# Altium PCB Receptor32UV1.0.PcbDoc
Units mm, origin at the board's own origin, x right, y up, seen from the top; angles counter-clockwise.
Board outline 400 x 50 mm, 2 copper layers (Top Layer, Bottom Layer); 88 components, 84 nets, 509 pads, 115 vias.
Unrouted connection lines stored in the file: 2.
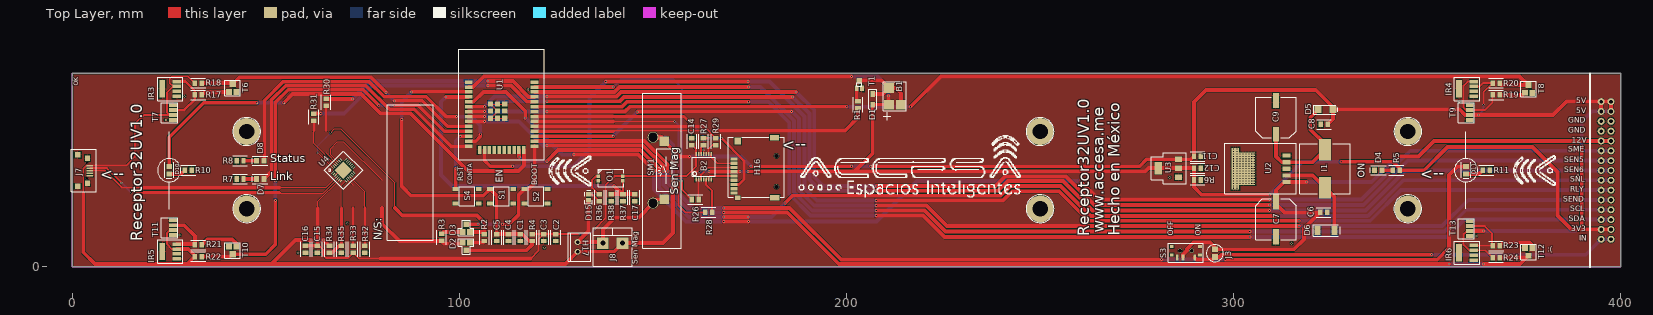
[diagram p0: Top Layer view]
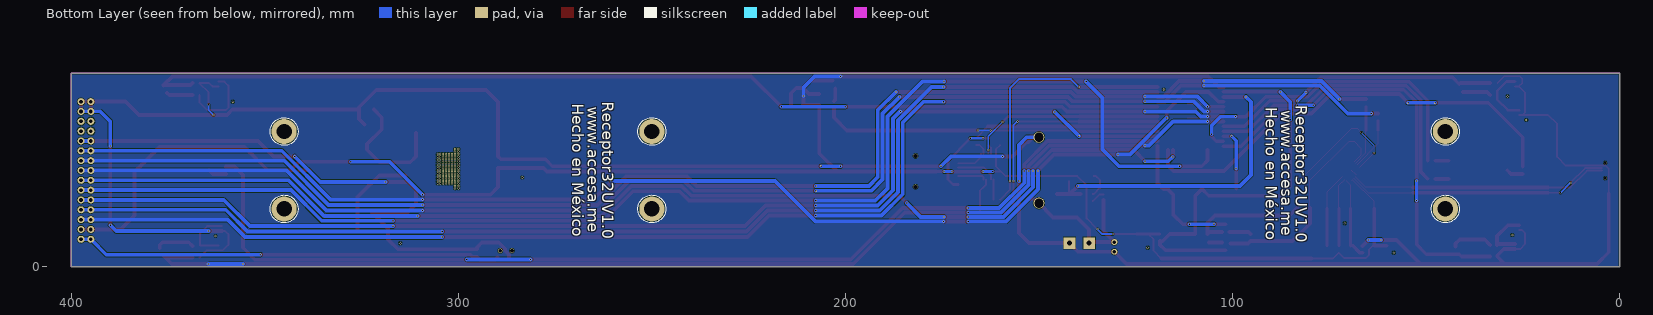
[diagram p1: Bottom Layer view, seen from below]

## Layer stack, top to bottom
Top Solder: solder mask 0.0102, Solder Resist, Dk 3.5
Top Layer: signal copper 0.0356
Dielectric 1: dielectric 0.32, FR-4, Dk 4.8
Bottom Layer: signal copper 0.0356
Bottom Solder: solder mask 0.0102, Solder Resist, Dk 3.5

## Board outline
0,0 400,0 400,50 0,50

## Design rules (kind name [scope] priority, off if disabled: settings)
Clearance [All] p1: gap=0.15
PolygonConnect [All] p1: connectstyle=Relief reliefconductorwidth=0.254 reliefentries=4 polygonreliefangle="90 Angle" airgapwidth=0.254
RoutingVias [All] p1: holewidth=0.3 width=0.5 viastyle="Through Hole" minholewidth=0.3 minwidth=0.4 maxholewidth=0.3 maxwidth=0.5
SolderMaskExpansion [All] p1: expansion=0.102
Width [All] p1: maxlimit=5 minlimit=0.1 preferedwidth=0.5
30 further rules are at their usual default settings.

## Classes and differential pairs
component class "Reset Contador": S4
component class Optoacoplador: C17 D15 H17 J8 O1 R36 R37 R38
component class Buzzer: B1 D1 R1 T1
component class ESP32: C1 C2 C3 C4 C5 D2 D3 R2 R3 R4 S1 S2 U1
component class Fuente: C6 C7 C8 C9 C11 C12 D4 D5 D6 I1 J3 R5 R6 S3 U3
component class "Leds Indicadores": D7 D8 D10 D11 R7 R8 R10 R11
component class "Receptor U": IR3 IR4 IR5 IR6 R17 R18 R19 R20 R21 R22 R23 R24 T6 T7 T8 T9 T10 T11 T12 T13
component class SD: B2 C14 H16 R26 R27 R28 R29
component class USB: C15 C16 J7 R30 R31 R32 R33 R34 R35 U4

## Components (designator, comment, footprint, x,y, rotation, side; value= is the part's Value field where it differs from the comment)
B1 "BuzzerSMD" BUZZERSMD 210.947,41.91 r90 top
B2 "74LVC125A" 74LVC125APW,118 163.068,25.908 r0 top
C1 "Cap 10nf smd" CAP10NFSMD 115.697,6.709 r90 top
C2 "Cap 0.1uf smd" CAP0.1UFSMD 124.841,6.709 r90 top
C3 "Cap 10uf smd" CAP10UFSMD 121.793,6.709 r90 top
C4 "Cap 0.1uf smd" CAP0.1UFSMD 112.649,6.709 r90 top
C5 "Cap 0.1uf smd" CAP0.1UFSMD 109.601,8.509 r270 top
C6 "Cap 0.1uf smd" CAP0.1UFSMD 322.326,14.097 r0 top
C7 "Cap 680uf smd" CAP680UFSMD 310.896,12.319 r90 top
C8 "Cap 0.1uf smd" CAP0.1UFSMD 322.453,36.83 r0 top
C9 "Cap 220uf smd" CAP220UFSMD 310.896,38.608 r270 top
C11 "Cap 100nf smd" CAP100NFSMD 290.64,28.575 r0 top
C12 "Cap 10uf smd" CAP10UFSMD 289.74,25.527 r0 top
C14 "Cap 100nf smd" CAP100NFSMD 160.02,32.385 r90 top
C15 "Cap 0.1uf smd" CAP0.1UFSMD 63.246,5.483 r270 top
C16 "Cap 4.7uf smd" CAP4.7UFSMD 60.198,3.683 r90 top
C17 "Cap 1uf" "CAP 1UFSMD" 145.288,17.018 r90 top
D1 "1N4148" 1N4148 206.756,41.91 r90 top
D2 "SS8050" SS8050 101.727,4.318 r0 top
D3 "SS8050" SS8050 101.727,11.049 r180 top
D4 "Led Verde 0805" "Led 0805 Verde" 337.365,25 r0 top
D5 "SS24" SS24 321.818,40.64 r0 top
D6 "PMEG3050EP" PMEG3050EP 326.009,9.398 r180 top
D7 "HL-PC-2012H322W-L(9000K-16000K)" "Led 0805 White" 48.514,22.733 r0 top
D8 "Led Verde 0805" "Led 0805 Verde" 48.514,27.432 r0 top
D10 "Led 0805 Amarillo" "Led 0805 Amarillo" 25,25 r90 top
D11 "Led 0805 Amarillo" "Led 0805 Amarillo" 360,25 r90 top
D15 "LED 0805 SMD" "LED SMD Amarillo" 133.35,17.272 r90 top
H16 "TF-15x15" TF-15x15 181.864,25.654 r90 top
H17 "XHP-2 CONECTOR" "CONECTOR 2 PINES" 128.143,8.89 r270 top
I1 "Inductor 33uh" "Inductor 33UH" 323.596,25.4 r90 top
IR3 "TSMP6000TT" TSMP6000TT 26,46 r90 top
IR4 "TSMP6000TT" TSMP6000TT 361,46 r90 top
IR5 "TSMP6000TT" TSMP6000TT 26,4 r90 top
IR6 "TSMP6000TT" TSMP6000TT 361,3.683 r90 top
J3 "JumperSMD" "Jumper SMD" 295.148,4.572 r270 top
J7 "USB smd" "USB smd" 3.683,24.892 r90 top
J8 "JACK 2IN" "Terminal Blocks 2in" 134.493,2.921 r0 top
O1 "TCMT1100" TCMT110 135.89,22.225 r0 top
R1 "Res 1K smd" "RES 1K" 202.946,41.021 r90 top
R2 "Res 10K smd" "RES 10K" 106.426,8.509 r270 top
R3 "Res 10K smd" "RES 10K" 95.377,6.731 r90 top
R4 "Res 10K smd" "RES 10K" 118.745,6.709 r90 top
R5 "Res 560 Ohms smd" "RES 560" 342.9,25 r180 top
R6 "Res 120ohms" "RES 120OHMS" 291.54,22.479 r180 top
R7 "Res 49.9 Ohms smd" "RES 49.9 OHMS" 44.196,22.733 r180 top
R8 "Res 49.9 Ohms smd" "RES 49.9 OHMS" 44.196,27.432 r180 top
R10 "Res 49.9 Ohms smd" "RES 49.9 OHMS" 29,25 r0 top
R11 "Res 49.9 Ohms smd" "RES 49.9 OHMS" 364.363,25 r0 top
R17 "Res 1K smd" "RES 1K" 31.623,44.45 r0 top
R18 "Res 1K smd" "RES 1K" 33.401,47.498 r180 top
R19 "Res 1K smd" "RES 1K" 366.903,44.45 r0 top
R20 "Res 1K smd" "RES 1K" 368.681,47.498 r180 top
R21 "Res 1K smd" "RES 1K" 31.623,5.715 r0 top
R22 "Res 1K smd" "RES 1K" 33.401,2.667 r180 top
R23 "Res 1K smd" "RES 1K" 366.903,5.461 r0 top
R24 "Res 1K smd" "RES 1K" 368.681,2.413 r180 top
R26 "Res 3.3K" "Res 3.3K" 160.909,17.526 r0 top
R27 "Res 3.3K" "Res 3.3K" 162.941,32.385 r90 top
R28 "Res 3.3K" "Res 3.3K" 164.338,14.224 r0 top
R29 "Res 3.3K" "Res 3.3K" 166.116,32.385 r90 top
R30 "Res 0ohms" "RES 0 Ohms" 65.532,43.434 r270 top
R31 "Res 0ohms" "RES 0 Ohms" 62.357,39.624 r270 top
R32 "Res 10K smd" "RES 10K" 75.565,5.483 r270 top
R33 "Res 2K smd" "RES 2K" 72.517,5.483 r270 top
R34 "Res 22.1K smd" "RES 22.1K" 66.421,5.461 r270 top
R35 "Res 47.5K" "RES 47.5K" 69.469,3.683 r90 top
R36 "Res 560 Ohms smd" "RES 560" 136.144,17.018 r90 top
R37 "Res 1K smd" "RES 1K" 142.24,17.018 r90 top
R38 "Res 10K smd" "RES 10K" 139.192,17.018 r90 top
S1 "TS-1187A-B-A-B" TS-1187A-B-A-B 110.871,18.288 r0 top
S2 "TS-1187A-B-A-B" TS-1187A-B-A-B 119.761,18.288 r0 top
S3 "MSS3-Q-T/R" MSS3-Q-T/R 287.655,4.191 r180 top
S4 "TS-1187A-B-A-B" TS-1187A-B-A-B 101.981,18.288 r0 top
SM1 "Comment" "Switch Magnetico" 152.9,25 r90 top
T1 "TRANSISTORS (NPN/PNP) NPN 100MA 45V" C8659 202.184,46.482 r0 top
T6 "BC847A" BC847A#1 41.402,47.244 r0 top
T7 "TSMP77000" TSMP77000 26,39.878 r90 top
T8 "BC847A" BC847A#2 376.174,46.99 r0 top
T9 "TSMP77000" TSMP77000 361,39.878 r90 top
T10 "BC847A" BC847A#1 41.402,3.302 r180 top
T11 "TSMP77000" TSMP77000 26,10.16 r90 top
T12 "BC847A" BC847A#2 376.174,2.921 r180 top
T13 "TSMP77000" TSMP77000 361,9.906 r90 top
U1 "ESP32" ESP32 109.855,40.259 r0 top
U2 "LM2596" LM2596 313.646,21.971 r0 top
U3 "LD1117" LD1117 285.75,25.527 r90 top
U4 "CP2102" CP2102 70,25 r45 top

## Footprints (in the part's own frame and the unit in brackets; to place one, negate y for a bottom-side part, rotate by r counter-clockwise, add the part's x,y. Pads: shape width x height; smd on the part's side, far side on the other; paste and mask are expansions set on the pad)
1N4148 [mm]
  rect 1.5x1.22 smd: 1(2.81,0) 2(0,0)
  silkscreen extent -1.5,-1 4,1
74LVC125APW,118 [mm] "74LVC125APW,118"
  rect 0.4x1 smd: 1(-1.95,-3.3) 2(-1.3,-3.3) 3(-0.65,-3.3) 4(0,-3.3) 5(0.65,-3.3) 6(1.3,-3.3) 7(1.95,-3.3) 8(1.95,3.3) 9(1.3,3.3) 10(0.65,3.3) 11(0,3.3) 12(-0.65,3.3) 13(-1.3,3.3) 14(-1.95,3.3)
  silkscreen extent -3,-2.5 3,2.5
BC847A#1 [mm]
  rect 1.5x1.5 smd: 1(-0.95,-2) 2(0.95,-2.02)
  rect 1.6x1.6 smd: 3(0,0)
  silkscreen extent -2,-3 2,1
BC847A#2 [mm]
  rect 1.5x1.5 smd: 1(-0.95,-2) 2(0.95,-2.02) 3(0,0)
  silkscreen extent -2,-3 2,1
BUZZERSMD [mm]
  rect 2.5x2.5 smd: 1(0,0) 2(0,-3.12) 3(4.35,0)
  silkscreen extent -4,-4.5 6,1.5
C8659 [mm] "TRANSISTORS (NPN/PNP) NPN 100MA 45V SOT-323(SC-70) ROHS"
  rect 1x1.5 smd: 1(0.45,-0.32) 2(1.75,-0.32)
  rect 1.5x1.5 smd: 3(1.1,1.651)
  silkscreen extent 0.38,0.25 1.78,1.14
CAP0.1UFSMD [mm]
  rect 1.15x1.45 smd: 1(0,0) 2(1.8,0)
  silkscreen extent -1,-1.25 2.8,1.25
CAP4.7UFSMD [mm]
  rect 1.15x1.45 smd: 1(0,0) 2(1.8,0)
  silkscreen extent -1,-1.25 2.8,1.25
CAP10NFSMD [mm]
  rect 1.15x1.45 smd: 1(0,0) 2(1.8,0)
  silkscreen extent -1,-1.25 2.8,1.25
CAP10UFSMD [mm]
  rect 1.15x1.45 smd: 1(0,0) 2(1.8,0)
  silkscreen extent -1,-1.25 2.8,1.25
CAP100NFSMD [mm]
  rect 1.15x1.45 smd: 1(-0.9,0) 2(0.9,0)
  silkscreen extent -1.9,-1.25 1.9,1.25
CAP220UFSMD [mm]
  rect 3x1.5 smd: 1(4,0) 2(-4,0)
  silkscreen extent -5.25,-5.25 5.25,5.25
CAP680UFSMD [mm]
  rect 3x1.5 smd: 1(4,0) 2(-4,0)
  silkscreen extent -5.25,-5.25 5.25,5.25
"CAP 1UFSMD" [mm] "CL21B105KBFNNNE"
  rect 1.15x1.45 smd: 1(0,0) 2(1.8,0)
  silkscreen extent -1,-1.25 2.8,1.25
"CONECTOR 2 PINES" [mm] "CONECTOR JTS XH 2 PINES"
  round 1.5 hole 0.9: 1(2.45,2.35) 2(4.95,2.35)
  silkscreen extent 0,0 7.4,5.75
CP2102 [mm]
  rect 0.9x0.25 smd: 1(-2.4,1.5) 2(-2.4,1) 3(-2.4,0.5) 4(-2.4,0) 5(-2.4,-0.5) 6(-2.4,-1) 7(-2.4,-1.5) 15(2.4,-1.5) 16(2.4,-1) 17(2.4,-0.5) 18(2.4,0) 19(2.4,0.5) 20(2.4,1) 21(2.4,1.5)
  rect 3.25x3.25 smd: 3(0,0)
  rect 0.25x0.9 smd: 8(-1.5,-2.4) 9(-1,-2.4) 10(-0.5,-2.4) 11(0,-2.4) 12(0.5,-2.4) 13(1,-2.4) 14(1.5,-2.4) 22(1.5,2.4) 23(1,2.4) 24(0.5,2.4) 25(0,2.4) 26(-0.5,2.4) 27(-1,2.4) 28(-1.5,2.4)
  silkscreen extent -3.5,-3.5 3.5,3.5
ESP32 [mm]
  rect 2x0.9 smd: 1(-7.5,7.5) 2(-7.5,6.23) 3(-7.5,4.96) 4(-7.5,3.69) 5(-7.5,2.42) 6(-7.5,1.15) 7(-7.5,-0.12) 8(-7.5,-1.39) 9(-7.5,-2.66) 10(-7.5,-3.93) 11(-7.5,-5.2) 12(-7.5,-6.47) 13(-7.5,-7.74) 14(-7.5,-9.01) 25(9.5,-9.01) 26(9.5,-7.74) 27(9.5,-6.47) 28(9.5,-5.2) 29(9.5,-3.93) 30(9.5,-2.66) 31(9.5,-1.39) 32(9.5,-0.12) 33(9.5,1.15) 34(9.5,2.42) 35(9.5,3.69) 36(9.5,4.96) 37(9.5,6.23) 38(9.5,7.5)
  rect 1.33x1.33 smd: 1(-1.835,-1.835) 1(-1.835,0) 1(-1.835,1.835) 1(0,-1.835) 1(0,0) 1(0,1.835) 1(1.835,-1.835) 1(1.835,0) 1(1.835,1.835)
  rect 0.9x2 smd: 15(-4.665,-10.01) 16(-3.395,-10.01) 17(-2.125,-10.01) 18(-0.855,-10.01) 19(0.415,-10.01) 20(1.685,-10.01) 21(2.955,-10.01) 22(4.225,-10.01) 23(5.495,-10.01) 24(6.765,-10.01)
  silkscreen extent -10,-12.5 12,16
"Inductor 33UH" [mm]
  rect 5.5x3 smd: 1(-4.9,0) 2(4.9,0)
  silkscreen extent -6.5,-6.5 6.5,6.5
"Jumper SMD" [mm]
  rect 1.5x1.5 smd: 1(0,0) 2(2,0)
  silkscreen extent -1.19,-2.19 3.19,2.19
LD1117 [mm]
  rect 1.4x1.75 smd: 1(2.3,0) 2(-2.3,0) 3(0,0)
  rect 3.3x2 smd: 3(0,5.25)
  silkscreen extent -4,-2 4,7
"Led 0805 Amarillo" [mm] "NCD0805Y1"
  rect 1.3x1.5 smd: 1(-1,0) 2(1,0)
  silkscreen extent -2.1,-1.2 2,1.2
"Led 0805 Verde" [mm] "NCD0805G1"
  rect 1.3x1.5 smd: 1(-1,0) 2(1,0)
  silkscreen extent -2.1,-1.2 2,1.2
"Led 0805 White" [mm] "HL-PC-2012H322W-L(9000K-16000K)"
  rect 1.3x1.5 smd: 1(-1,0) 2(1,0)
  silkscreen extent -2.1,-1.2 2,1.2
"LED SMD Amarillo" [mm]
  rect 1.2x1.25 smd: 1(0,0) 2(1.5,0)
  silkscreen extent -1,-1 2.5,1
LM2596 [mm]
  rect 2.16x1.07 smd: 1(-0.004,0) 2(-0.004,1.7) 3(-0.004,3.4) 4(-0.004,5.1) 5(-0.004,6.8)
  rect 1.91x10.8 smd: 3(-13.215,3.4)
  rect 5.8x8.33 smd: 3(-11,3.4)
  silkscreen extent -16,-3 2.5,10
MSS3-Q-T/R [mm] "MSS3-Q-T/R"
  rect 0.7x1.5 smd: 1(-2.25,1.75) 2(0.75,1.75) 3(2.25,1.75)
  rect 1x0.8 smd: NC(-3.65,-1.05) NC(-3.65,1.05) NC(3.65,-1.05) NC(3.65,1.05)
  round 1.1 hole 1: NC(-1.5,0) NC(1.5,0)
  silkscreen extent -4.5,-2 4.5,3
PMEG3050EP [mm]
  rect 1.6x2.3 smd: 1(4.4,0) 2(0,0)
  silkscreen extent -1.5,-1.5 5.5,1.5
"RES 0 Ohms" [mm]
  rect 1.15x1.45 smd: 1(0,0) 2(1.8,0)
  silkscreen extent -1,-1.25 2.8,1.25
"RES 1K" [mm]
  rect 1.15x1.45 smd: 1(0,0) 2(1.8,0)
  silkscreen extent -1,-1.25 2.8,1.25
"RES 2K" [mm]
  rect 1.15x1.45 smd: 1(0,0) 2(1.8,0)
  silkscreen extent -1,-1.25 2.8,1.25
"Res 3.3K" [mm] "AECR0805F3K30K9"
  rect 1.15x1.45 smd: 1(-0.9,-0.1) 2(0.9,-0.1)
  silkscreen extent -1.9,-1.35 1.9,1.15
"RES 10K" [mm]
  rect 1.15x1.45 smd: 1(0,0) 2(1.8,0)
  silkscreen extent -1,-1.25 2.8,1.25
"RES 22.1K" [mm]
  rect 1.15x1.45 smd: 1(0,0) 2(1.8,0)
  silkscreen extent -1,-1.25 2.8,1.25
"RES 47.5K" [mm]
  rect 1.15x1.45 smd: 1(0,0) 2(1.8,0)
  silkscreen extent -1,-1.25 2.8,1.25
"RES 49.9 OHMS" [mm] "0805W8F499JT5E"
  rect 1.15x1.45 smd: 1(0,0) 2(1.8,0)
  silkscreen extent -1,-1.25 2.8,1.25
"RES 120OHMS" [mm]
  rect 1.15x1.45 smd: 1(0,0) 2(1.8,0)
  silkscreen extent -1,-1.25 2.8,1.25
"RES 560" [mm] "0805W8F5600T5E"
  rect 1.15x1.45 smd: 1(0,0) 2(1.8,0)
  silkscreen extent -1,-1.25 2.8,1.25
SS24 [mm] "Schottky 40V 2A"
  rect 1.8x1.8 smd: 1(0,0) 2(3.83,0)
  silkscreen extent -1.2,-1.2 5,1.2
SS8050 [mm]
  rect 1.5x1.5 smd: 1(-0.95,2) 2(0.95,2) 3(0,0)
  silkscreen extent -2,-1 2,3
"Switch Magnetico" [mm] "59170-1-S-00-D"
  rect 2.5x2.5 smd: 1(-7.5,0) 2(7.5,0)
  silkscreen extent -5.5,-2 5.5,2
TCMT110 [mm] "TCMT1100"
  rect 0.9x0.9 smd: 1(0,1.27) 2(0,0) 3(6.3,0) 4(6.3,1.27)
  silkscreen extent 0,-1.5 6.5,3
"Terminal Blocks 2in" [mm] "Pluggable Terminal Blocks WR-TBL Mod312 5.08mm 2Pin Opn Hztl PCBHdr"
  rect 3x3 hole 1.3: 1(2.54,3.25) 2(7.62,3.25)
  silkscreen extent 0,-2.75 10.16,7.25, body extent 1.68,-1.38 8.67,5.53, height 8.8
TF-15x15 [mm] "TF-15x15"
  rect 0.8x1.8 smd: 1(2.25,11) 2(1.15,11) 3(0.05,11) 4(-1.05,11) 5(-2.15,11) 6(-3.25,11) 7(-4.35,11) 8(-5.45,11) 9(-6.55,11)
  rect 1.4x2.4 smd: 10(-7.75,0.4) 10(7.75,0.5)
  rect 1.2x1.5 smd: 10(-7.75,10)
  rect 1.8x1.7 smd: 10(6.85,10)
  round 1.1 hole 1: 11(-4.95,0) 11(3.05,0)
  silkscreen extent -7.7,-2 7.8,12.5
TS-1187A-B-A-B [mm] "TS-1187A-B-A-B"
  rect 1.5x1 smd: 1(-3,-1.875) 2(3,-1.875) 3(3,1.875) 4(-3,1.875)
  silkscreen extent -2,-2.5 2,2.5
TSMP6000TT [mm]
  rect 0.9x2.2 smd: 1(-1.905,-1) 2(-0.635,-1) 3(0.635,-1) 4(1.905,-1)
  rect 4.5x1.5 smd: 1(0,2.8)
  silkscreen extent -3,-2.5 3,4
TSMP77000 [mm] "TSMP77000"
  rect 1x2 smd: 1(-1.905,0) 2(-0.635,0) 3(0.635,0) 4(1.905,0)
  silkscreen extent -2.6,-1.2 2.6,3
"USB smd" [mm]
  rect 1.4x1.5 smd: 1(-4.05,2.31) 1(4.05,2.31)
  rect 1.4x1.2 smd: 1(-3.25,-0.2) 1(3.25,-0.2)
  round 0.6 hole 0.6: 1(-2,0) 1(2,0)
  rect 0.4x1.6 smd: 1(-1.3,-0.8) 2(-0.65,-0.8) 3(0,-0.8) 4(0.65,-0.8) 5(1.3,-0.8)
  silkscreen extent -5.5,-2.5 5.5,4

## Part data
C1: "10nf"
C2 C4 C5 C6 C8 C15: "0.1uf"
C3 C12: "10uf"
C7: "Cap 680uf"
C9: "Cap 220uf"
C11 C14: "100nf"
C16: "4.7uf"
D4 D8: library part "Led 0805 Verde"
D5: "Schottky 40V 2A"
D6: "Diodo Schottky 30V 5A"
D7: library part "LED White 0805"
D10 D11: "NCD0805Y1"
D15: "LED 0805 Yellow"
H17: library part B2B-XH-A(LF)(SN), "CONECTOR JST-XH 2 PINES"
I1: "33uh"
J3: library part "Jumper para soldar"
J8: "Pluggable Terminal Blocks WR-TBL Mod312 5.08mm 2Pin Opn Hztl PCBHdr"
O1: library part TCMT110
R2 R3 R4 R32 R38: "10K"
R5 R36: "Res 560 ohms smd"
R6: "120 ohms"
R26 R27 R28 R29: "AECR0805F3K30K9"
R33: "2K"
R34: "22.1K"
R35: "47.5K"
T1: library part C8659, "TRANSISTORS (NPN/PNP) NPN 100MA 45V SOT-323(SC-70) ROHS"

## Free pads (board coordinates)
  round 4 hole 4: 0(45,15) 0(250,15) 0(345,15) 0(345,35) NC(45,35)
  round 2.8 hole 2.4: 0(150,16.5) 0(150,33.5)
  round 4 hole 4 paste+0: 0(250,35)
  round 1.8 hole 0.95: 0(397.467,42.715) 1(394.927,42.715) 2(394.927,40.175) 3(397.467,40.175) 4(397.467,37.635) 5(394.927,37.635) 6(394.927,35.095) 7(397.467,35.095) 8(397.467,32.555) 9(394.927,32.555) 10(394.927,30.015) 11(397.467,30.015) 12(397.467,27.475) 13(394.927,27.475) 14(394.927,24.935) 15(397.467,24.935) 16(397.467,22.395) 17(394.927,22.395) 18(394.927,19.855) 19(397.467,19.855) 20(394.927,17.315) 21(397.467,17.315) 22(397.467,14.775) 23(394.927,14.775) 24(394.927,12.235) 25(397.467,12.235) 26(397.467,9.695) 27(394.927,9.695) 28(394.927,7.155) 29(397.467,7.155)
  oct 0.5x0.5 hole 0.3: 1(28.956,44.069) 2(24.13,37.973) 3(27.686,8.255) 5(70.993,11.303) 6(121.92,4.953) 7(117.729,45.847) 8(283.464,23.114) 10(314.96,6.096) 11(362.712,8.001) 13(358.267,42.672)
  round 6.5 smd far side: 2(45,15) 2(45,35) 2(250,15) 2(250,35) 2(345,15) 2(345,35)
  oct 0.5x0.5 hole 0.3 mask+0.102: 4(58.293,3.683)
  rect 1.5x1.2 smd: 4(310.896,6.35) 5(310.896,18.415)
  rect 1.5x1.5 smd: 6(310.896,44.196) 7(310.896,33.147)
  round 0.5 hole 0.3: 30(299.974,20.32) 30(299.974,20.955) 30(299.974,21.59) 30(299.974,22.225) 30(299.974,22.86) 30(299.974,23.495) 30(299.974,24.13) 30(299.974,24.765) 30(299.974,25.4) 30(299.974,26.035) 30(299.974,26.67) 30(299.974,27.305) 30(299.974,27.94) 30(299.974,28.575) 30(299.974,29.21) 30(299.974,29.845) 30(299.974,30.48) 30(300.863,20.32) 30(300.863,20.955) 30(300.863,21.59) 30(300.863,22.225) 30(300.863,22.86) 30(300.863,23.495) 30(300.863,24.13) 30(300.863,24.765) 30(300.863,25.4) 30(300.863,26.035) 30(300.863,26.67) 30(300.863,27.305) 30(300.863,27.94) 30(300.863,28.575) 30(300.863,29.21) 30(300.863,29.845) 30(300.863,30.48) 30(301.625,21.59) 30(301.625,22.225) 30(301.625,22.86) 30(301.625,23.495) 30(301.625,24.13) 30(301.625,24.765) 30(301.625,25.4) 30(301.625,26.035) 30(301.625,26.67) 30(301.625,27.305) 30(301.625,27.94) 30(301.625,28.575) 30(301.625,29.21) 30(302.387,21.59) 30(302.387,22.225) 30(302.387,22.86) 30(302.387,23.495) 30(302.387,24.13) 30(302.387,24.765) 30(302.387,25.4) 30(302.387,26.035) 30(302.387,26.67) 30(302.387,27.305) 30(302.387,27.94) 30(302.387,28.575) 30(302.387,29.21) 30(303.149,21.59) 30(303.149,22.225) 30(303.149,22.86) 30(303.149,23.495) 30(303.149,24.13) 30(303.149,24.765) 30(303.149,25.4) 30(303.149,26.035) 30(303.149,26.67) 30(303.149,27.305) 30(303.149,27.94) 30(303.149,28.575) 30(303.149,29.21) 30(303.911,21.59) 30(303.911,22.225) 30(303.911,22.86) 30(303.911,23.495) 30(303.911,24.13) 30(303.911,24.765) 30(303.911,25.4) 30(303.911,26.035) 30(303.911,26.67) 30(303.911,27.305) 30(303.911,27.94) 30(303.911,28.575) 30(303.911,29.21) 30(304.673,21.59) 30(304.673,22.225) 30(304.673,22.86) 30(304.673,23.495) 30(304.673,24.13) 30(304.673,24.765) 30(304.673,25.4) 30(304.673,26.035) 30(304.673,26.67) 30(304.673,27.305) 30(304.673,27.94) 30(304.673,28.575) 30(304.673,29.21) 30(305.308,21.59) 30(305.308,22.225) 30(305.308,22.86) 30(305.308,23.495) 30(305.308,24.13) 30(305.308,24.765) 30(305.308,25.4) 30(305.308,26.035) 30(305.308,26.67) 30(305.308,27.305) 30(305.308,27.94) 30(305.308,28.575) 30(305.308,29.21)
  round 7 smd: NC(45,15) NC(45,35) NC(250,15) NC(250,35) NC(345,15) NC(345,35)

## Via types
v1: diameter 0.5, hole 0.3, Top Layer to Bottom Layer, tented both sides, 114 vias
v2: diameter 0.5, hole 0.3, Top Layer to Bottom Layer, 1 vias

## Nets (pads, with @x,y where several pads share a name; then routed paths per layer and width w, separated by ;. In a path a pad name is that pad's centre, name@x,y a point inside that pad or via, vN(x,y) a via of type N, cw(c..) or ccw(c..) an arc to the next point about the centre after c; other vN are vias at no path point)
3V3: B1.1 B2.14 C2.2 C3.2 C12.1 C14.1 C15.1 C16.2 D1.2 H16.4 O1.4 pad.26 pad.27 R4.2 R5.1 R6.2 R33.2 U1.2 U3.3 U4.6 U4.7 | length 554.8
  Top Layer w0.3: 63.373,15.24 63.373,16.959 U4.6 U4.7
  Top Layer w0.5: C15.1 63.732,5.483 64.77,4.445 64.77,3.048 65.532,2.286 71.12,2.286 R33.2 74.041,2.159 79.629,2.159 ; 118.364,2.159 120.396,4.191 120.396,7.178 C3.2@121.727,8.509 ; C2.2 v1(130.937,8.509) ; v1(134.874,9.779) 137.668,12.573 137.668,21.082 140.081,23.495 O1.4 158.623,23.495 159.893,24.765 ; 160.02,24.638 v1(161.925,24.638) ; 160.02,24.765 159.893,24.765 ; C14.1 161.118,30.387 B2.14 161.118,25.99 159.893,24.765
  Top Layer w0.8: C15.1@63.373,5.483 63.373,15.24 ; R4.2 121.727,8.509 C3.2 C2.2 ; v1(164.465,24.638) 164.499,24.604 H16.4 172.432,24.604 v1(172.466,24.638) ; v1(174.498,24.638) 176.53,24.638
  Top Layer w1: C16.2 C15.1@63.373,5.483 ; 79.629,2.159 118.364,2.159 ; U1.2 103.512,46.489 106.246,49.223 v1(201.295,49.223) ; 176.53,24.638 202.057,24.638 ; v1(210.82,44.196) 210.82,42.037 B1.1 D1.2 206.756,29.337 202.057,24.638 ; v1(309.245,18.669) 291.719,18.669 289.74,20.648 R6.2 C12.1 285.75,25.527 280.5,25.527 278.003,25.527 277.114,24.638 202.057,24.638 ; v1(327.787,27.178) 341.141,27.178 342.9,25.419 R5.1 349.231,25 355.219,30.988 377.19,30.988 383.667,24.511 383.667,13.335 387.307,9.695 pad.27 pad.26
  Bottom Layer w0.5: v1(130.937,8.509) 133.604,8.509 v1(134.874,9.779)
  Bottom Layer w0.8: v1(161.925,24.638) v1(164.465,24.638) ; v1(172.466,24.638) v1(174.498,24.638)
  Bottom Layer w1: v1(201.295,49.223) 207.952,49.223 210.82,46.355 v1(210.82,44.196) ; v1(309.245,18.669) 317.754,27.178 v1(327.787,27.178)
12V: C6.1 C7.1 J3.1 pad.5@310.896,18.415 pad.8@397.467,32.555 pad.9 S3.2 U2.1 | length 154.5
  Top Layer w1: S3.2 286.905,3.244 287.909,4.248 287.909,4.642 289.558,6.291 293.937,6.291 295.148,5.08 J3.1 315.595,4.572 318.135,7.112 318.135,9.906 C6.1 313.118,14.097 C7.1 310.896,19.812 313.055,21.971 U2.1 v1(318.77,21.971) ; v1(342.265,28.575) 347.726,28.575 351.706,32.555 pad.9 pad.8@397.467,32.555
  Bottom Layer w1: v1(318.77,21.971) 335.661,21.971 v1(342.265,28.575) ; pad.9 pad.8@397.467,32.555
12VIN: J3.2 pad.28 pad.29 S3.1 | length 109.9
  Top Layer w1: S3.1 290.419,1.927 294.503,1.927 J3.2 296.196,2.572 296.799,3.175 v1(351.155,3.175)
  Bottom Layer w1: v1(351.155,3.175) 390.947,3.175 pad.28 pad.29
12VINF: 
ACTIVITY: 
BOOT: D3.3 S2.4 U1.25 | length 34.6
  Top Layer w1: D3.3 v1(104.775,11.049) ; v1(111.125,11.049) 112.776,11.049 115.316,13.589 115.316,18.718 S2.4 117.826,20.163 119.355,21.692 U1.25
  Bottom Layer w1: v1(104.775,11.049) v1(111.125,11.049)
BUZZER: R1.1 U1.28 | length 87.6
  Top Layer w0.5: 139.693,35.059 139.693,35.306 v1(162.56,35.306)
  Top Layer w1: U1.28 139.693,35.059 ; v1(165.735,35.306) 199.644,35.306 202.946,38.608 R1.1
  Bottom Layer w0.5: v1(162.56,35.306) v1(165.735,35.306)
CS: R29.2 U1.29 | length 48.1
  Top Layer w0.5: 163.188,36.329 166.216,33.301 R29.2
  Top Layer w1: U1.29 163.188,36.329
D+: J7.3 U4.4 | length 66.7
  Top Layer w0.3: 53.34,20.574 65.574,20.574 U4.4
  Top Layer w0.5: J7.3 8.382,24.892 12.7,20.574 18.415,20.574
  Top Layer w1: 18.415,20.574 53.34,20.574
D-: J7.4 U4.5 | length 68.4
  Top Layer w0.3: 53.34,19.05 64.757,19.05 U4.5
  Top Layer w0.5: J7.4 8.875,25.542 v1(12.7,21.717) ; v1(15.24,19.177) 18.415,19.177
  Top Layer w1: 18.415,19.177 53.34,19.177
  Bottom Layer w0.5: v1(12.7,21.717) v1(15.24,19.177)
DTR: D3.1 R2.1 U4.28 | length 73
  Top Layer w0.3: v1(63.373,29.464) 63.373,29.506 U4.28 ; v1(66.675,34.671) 67.691,35.687 69.342,35.687 83.312,21.717 83.312,15.24
  Top Layer w0.7: R2.1@105.886,9.049 R2.1
  Top Layer w1: 83.312,15.24 85.217,13.335 104.521,13.335 106.426,11.43 R2.1 ; D3.1 R2.1@105.886,9.049
  Bottom Layer w0.3: v1(63.373,29.464) 63.373,31.369 v1(66.675,34.671)
EN: C1.2 C4.2 C5.1 D2.3 R4.1 S1.4 U1.3 | length 104.8
  Top Layer w0.9: v1@87.637,45.219 U1.3
  Top Layer w1: v1(85.09,38.1) 85.09,20.828 87.503,18.415 106.123,18.415 S1.4 109.601,18.433 C5.1 C4.2 C1.2 116.205,8.509 118.005,6.709 ; D2.3 117.348,4.318 118.745,5.715 R4.1
  Bottom Layer w1: v1(85.09,38.1) 85.09,42.672 v1(87.63,45.212)
GND: B2.1 B2.4 B2.7 B2.10 B2.13 C1.1 C2.1 C3.1 C4.1 C5.2 C6.2 C7.2 C8.1 C9.2 C11.2 C12.2 C14.2 C15.2 C16.1 C17.1 D4.1 D6.1 H16.6 IR3.1 IR4.1 IR5.1 IR6.1 J7.1 O1.2 pad.1@28.956,44.069 pad.2@24.13,37.973 pad.3@27.686,8.255 pad.4 pad.5@70.993,11.303 pad.5@394.927,37.635 pad.6 pad.7@117.729,45.847 pad.7@397.467,35.095 pad.8@283.464,23.114 pad.10@314.96,6.096 pad.11@362.712,8.001 pad.13@358.267,42.672 pad.30 R6.1 R7.2 R8.2 R10.2 R11.2 R32.2 R35.1 R37.1 R38.1 S1.1 S1.2 S2.1 S2.2 S4.2 T1.2 T6.2 T7.1 T7.4 T8.2 T9.1 T9.4 T10.2 T11.1 T11.4 T12.2 T13.1 T13.4 U1.1 U1.15 U1.38 U2.3 U2.5 U3.2 U4.3 | length 14.4
  Top Layer w0.3: U4.3@67.949,23.656 U4.3@69.293,25 ; U1.1@111.69,38.424 109.855,38.424 108.02,38.424 109.855,40.259 108.02,42.094 109.855,42.094 U1.1@111.69,42.094
LINK: D7.2 U1.14 | length 80.1
  Top Layer w0.9: D7.2 51.308,24.527 51.308,43.053 55.109,46.854 75.794,46.854 81.915,40.733 88.299,40.733 97.783,31.249 U1.14
MISO: B2.11 U1.31 | length 50.4
  Top Layer w0.4: B2.11 v1(163.068,30.226)
  Top Layer w0.7: 139.566,38.869 157.981,38.869 v1(159.385,37.465)
  Top Layer w1: U1.31 139.566,38.869
  Bottom Layer w0.4: v1(159.385,37.465) 163.068,33.782 v1(163.068,30.226)
MOSI: R26.1 U1.37 | length 69.8
  Top Layer w0.5: v1(157.48,22.225) 157.48,19.955 R26.1
  Top Layer w1: U1.37 v1@139.693,46.489
  Bottom Layer w0.5: v1(139.7,46.482) 141.732,48.514 155.194,48.514 157.48,46.228 v1(157.48,22.225)
NetB1_2: B1.2 B1.3 D1.1 T1.3 | length 19.9
  Top Layer w1: T1.3 209.074,48.133 B1.3 ; D1.1 209.407,44.72 B1.3 ; B1.2 214.067,44.886 212.693,46.26 B1.3
NetB2_2: B2.2 R26.2 | length 5.1
  Top Layer w0.5: R26.2@161.768,17.467 B2.2
NetB2_3: B2.3 H16.3 | length 10.5
  Top Layer w0.5: B2.3 162.418,23.861 164.261,25.704 H16.3
NetB2_5: B2.5 R28.2 | length 9.1
  Top Layer w0.5: B2.5 163.718,21.178 165.238,19.658 R28.2
NetB2_6: B2.6 H16.5 | length 7.2
  Top Layer w0.5: B2.6 164.368,23.224 164.652,23.508 170.864,23.508 H16.5
NetB2_8: B2.8 H16.2 | length 7.3
  Top Layer w0.5: B2.8 165.018,28.403 166.617,26.804 H16.2
NetB2_9: B2.9 R29.1 | length 3.6
  Top Layer w0.5: B2.9 164.368,30.51 165.343,31.485 R29.1
NetB2_12: B2.12 R27.1 | length 2.5
  Top Layer w0.5: B2.12 162.418,30.862 R27.1
NetC9_1: C9.1 D5.1 I1.2 pad.7@310.896,33.147 U2.4 | length 33.5
  Top Layer w1: C9.1 310.896,28.575 312.4,27.071 U2.4 320.367,27.071 I1.2 323.596,31.75 319.786,35.56 319.786,38.608 D5.1
NetC13_1: 
NetC13_2: 
NetC13_3: 
NetD2_2: D2.2 R2.2 | length 3.4
  Top Layer w1: D2.2 R2.2@106.035,6.318
NetD3_2: D3.2 R3.2 | length 5.6
  Top Layer w1: R3.2 95.863,9.017 D3.2@100.745,9.017
NetD4_2: D4.2 R5.2 | length 2.7
  Top Layer w1: D4.2 R5.2
NetD6_2: D6.2 I1.1 U2.2 | length 23.4
  Top Layer w1: U2.2 320.425,23.671 I1.1 326.009,18.087 D6.2
NetD7_1: D7.1 R7.1 | length 3.3
  Top Layer w1: R7.1 D7.1
NetD8_1: D8.1 R8.1 | length 3.3
  Top Layer w1: R8.1 D8.1
NetD9_1: 
NetD10_1: D10.1 R10.1 | length 4.4
  Top Layer w1: D10.1 28,24 R10.1
NetD11_1: D11.1 R11.1 | length 4.8
  Top Layer w1: D11.1 363.363,24 R11.1
NetD12_1: 
NetD13_1: 
NetD13_2: 
NetD14_2: 
NetD15_1: D15.1 H17.1 J8.1 pad.0@150,16.5 SM1.1 | length 40.9
  Top Layer w1: D15.1 133.35,9.297 H17.1 J8.1@136.764,6.44 ; J8.1 137.033,9.652 140.208,12.827 146.327,12.827 150,16.5 151,17.5 SM1.1
NetD15_2: D15.2 pad.10@394.927,30.015 pad.11@397.467,30.015 R36.1 U1.5 | length 329.1
  Top Layer w0.5: D15.2 134.324,18.772 136.078,17.018 R36.1
  Top Layer w1: U1.5 103.639,42.679 106.172,45.212 112.014,45.212 116.967,40.259 v1(116.967,38.481) ; v1(129.54,29.069) 146.064,29.069 150.241,24.892 v1(150.241,24.765) ; v1(168.275,11.79) v1(174.625,11.79) ; v1(260.35,22.225) 265.176,17.399 v1(309.245,17.399)
  Bottom Layer w1: v1(116.967,38.481) 116.967,38.583 126.481,29.069 v1(129.54,29.069) ; v1(150.241,24.765) 150.241,20.066 158.517,11.79 v1(168.275,11.79) ; v1(174.625,11.79) 207.751,11.79 218.186,22.225 v1(260.35,22.225) ; v1(309.245,17.399) 332.994,17.399 345.61,30.015 394.927,30.015 pad.11@397.467,30.015
NetH16_7: H16.7 R27.2 | length 20.8
  Top Layer w0.7: R27.2 164.454,33.285 v1(164.465,33.274) ; v1(167.64,33.274) 173.482,27.432 173.482,22.606 172.18,21.304 H16.7
  Bottom Layer w0.7: v1(164.465,33.274) v1(167.64,33.274)
NetIR1_4: 
NetIR2_4: 
NetIR3_4: IR3.4 R17.1 T7.3 | length 14.6
  Top Layer w0.7: T7.3 28.829,40.513 31.623,43.307 R17.1 31.623,45.466 29.184,47.905 IR3.4
NetIR4_4: IR4.4 R19.1 T9.3 | length 19.2
  Top Layer w0.5: IR4.4 360.452,47.905 359.41,46.863 359.41,41.148 360.045,40.513 T9.3 364.871,40.513 366.903,42.545 R19.1
NetIR5_4: IR5.4 R21.1 T11.3 | length 13.5
  Top Layer w1: T11.3 28.829,10.795 31.623,8.001 R21.1 ; IR5.4 R21.1@31.433,5.905
NetIR6_4: IR6.4 R23.1 T13.3 | length 14.4
  Top Layer w0.5: T13.3 364.871,10.541 366.776,8.636 366.776,5.588 IR6.4
NetO1_1: O1.1 R36.2 | length 6.7
  Top Layer w0.5: O1.1 135.255,23.495 134.239,22.479 134.239,20.447 135.868,18.818 R36.2
NetR1_2: R1.2 T1.1 | length 3.5
  Top Layer w1: T1.1 202.634,43.133 R1.2
NetR13_2: 
NetR15_2: 
NetR17_2: R17.2 T6.1 | length 7.4
  Top Layer w1: R17.2 34.217,45.244 T6.1
NetR19_2: R19.2 T8.1 | length 6.7
  Top Layer w1: R19.2 374.684,44.45 T8.1
NetR21_2: R21.2 T10.1 | length 10.7
  Top Layer w1: R21.2 34.82,7.112 41.275,7.112 42.352,6.035 T10.1
NetR23_2: R23.2 T12.1 | length 9.8
  Top Layer w1: R23.2 369.633,6.391 376.387,6.391 377.124,5.654 T12.1
NetR34_2: R34.2 R35.2 U4.8 | length 20.4
  Top Layer w0.3: 69.469,15.24 69.469,21.075 U4.8
  Top Layer w0.8: R35.2 69.469,15.24
  Top Layer w1: R34.2 67.034,3.661 R35.2@68.856,5.483
RELAY: pad.18 pad.19 U1.16 | length 342.2
  Top Layer w1: U1.16 106.46,27.525 107.95,26.035 v1(113.665,26.035) ; v1(137.795,47.879) v1(174.498,47.879) ; v1(207.645,17.145) 240.411,17.145 242.824,19.558 254.889,19.558 262.509,11.938 v1(316.865,11.938)
  Bottom Layer w1: v1(113.665,26.035) 129.286,26.035 133.604,30.353 133.604,43.688 v1(137.795,47.879) ; v1(174.498,47.879) 180.086,47.879 189.103,38.862 189.103,20.32 192.278,17.145 v1(207.645,17.145) ; v1(316.865,11.938) 335.28,11.938 343.197,19.855 pad.18 pad.19
RST: R33.1 U4.9 | length 17.7
  Top Layer w0.3: U4.9 72.517,21.069 72.517,15.24
  Top Layer w0.8: R33.1 72.517,15.24
RSTCONTA: S4.4 U1.12 | length 16.2
  Top Layer w0.9: S4.4@99.06,20.242 v1(99.06,25.4) ; v1(100.203,33.782) 100.21,33.789 U1.12
  Bottom Layer w0.9: v1(99.06,25.4) 99.06,32.639 v1(100.203,33.782)
RTS: D2.1 R3.1 U4.24 | length 56.4
  Top Layer w0.3: U4.24 66.675,29.032 66.675,30.607 68.453,32.385 69.977,32.385 80.01,22.352 80.01,15.24
  Top Layer w1: 80.01,15.24 80.01,11.176 84.455,6.731 R3.1 96.012,6.096 D2.1@100.555,6.096
RXD: R30.2 U4.25 | length 16
  Top Layer w0.3: 65.532,35.306 65.532,29.468 U4.25
  Top Layer w0.8: 65.532,35.306 R30.2@65.532,41.507
RXUSB: R31.1 U1.34 | length 61.7
  Top Layer w1: R31.1 v1(64.135,39.624) ; v1(107.315,46.856) 113.291,46.856 117.468,42.679 U1.34
  Bottom Layer w1: v1(64.135,39.624) 70.231,39.624 77.463,46.856 v1(107.315,46.856)
SCL: pad.22 pad.23 U1.36 | length 307.3
  Top Layer w1: U1.36 140.049,45.219 141.312,46.482 v1(174.625,46.482) ; v1(207.645,14.605) 220.091,14.605 225.552,9.144 v1(304.165,9.144)
  Bottom Layer w1: v1(174.625,46.482) 177.8,46.482 186.436,37.846 186.436,19.304 191.135,14.605 v1(207.645,14.605) ; v1(304.165,9.144) 354.457,9.144 360.088,14.775 pad.23 pad.22
SDA: pad.24 pad.25 U1.33 | length 305.8
  Top Layer w1: U1.33 141.993,41.409 143.256,42.672 v1(174.625,42.672) ; v1(207.645,13.335) 219.71,13.335 225.298,7.747 v1(304.165,7.747)
  Bottom Layer w1: v1(174.625,42.672) 179.832,42.672 185.166,37.338 185.166,18.796 190.627,13.335 v1(207.645,13.335) ; v1(304.165,7.747) 355.092,7.747 359.58,12.235 pad.24 pad.25
SEND: pad.20 pad.21 U1.27 | length 306.7
  Top Layer w1: U1.27 v1(139.693,33.789) ; v1(145.923,40.005) 146.05,40.132 v1(185.801,40.132) ; v1(207.645,15.875) 220.599,15.875 225.933,10.541 v1(316.865,10.541)
  Bottom Layer w1: v1(139.693,33.789) 145.909,40.005 v1(145.923,40.005) ; v1(185.801,40.132) 185.928,40.132 187.706,38.354 187.706,19.812 191.643,15.875 v1(207.645,15.875) ; v1(316.865,10.541) 353.822,10.541 360.596,17.315 pad.20 pad.21
SENM: D11.2 U1.26 | length 277.1
  Top Layer w0.9: v1(297.815,1.905) 352.552,1.905 355.6,4.953
  Top Layer w1: U1.26 147.821,32.519 153.797,26.543 v1(153.797,24.765) ; v1(168.275,15.24) 185.293,15.24 198.606,1.927 v1(281.305,1.927) ; 355.6,4.953 355.6,23.749 357.851,26 D11.2
  Bottom Layer w1: v1(153.797,24.765) 153.797,21.717 160.274,15.24 v1(168.275,15.24) ; v1(281.305,1.927) v1@297.793,1.927
SENMAG: C17.2 O1.3 R37.2 R38.2 U1.4 | length 84.9
  Top Layer w0.5: R37.2 O1.3@142.24,22.175
  Top Layer w1: v1(96.52,43.942) 96.527,43.949 U1.4 ; R38.2 R37.2@142.091,18.818 ; v1(139.954,20.955) R37.2@142.091,18.818 ; C17.2 R37.2 R37.2@142.091,18.818
  Bottom Layer w1: v1(96.52,43.942) 95.25,42.672 95.25,23.749 98.044,20.955 v1(139.954,20.955)
SENSOR1: R18.1 T6.3 U1.10 | length 74.7
  Top Layer w0.9: T6.3 43.112,48.954 77.157,48.954 v1(81.026,45.085) ; v1(83.185,42.899) 90.324,42.899 96.894,36.329 U1.10
  Top Layer w1: R18.1 T6.3@41.148,47.498
  Bottom Layer w0.9: v1(81.026,45.085) 81.026,45.058 v1(83.185,42.899)
SENSOR2: R22.1 T10.3 U1.11 | length 112.8
  Top Layer w0.9: T10.3 49.911,3.302 52.451,5.842 v1(52.451,17.145) ; v1(52.451,22.225) 52.451,42.545 55.71,45.804 75.1,45.804 v1(79.121,41.783) ; v1(83.185,41.783) 89.281,41.783 96.005,35.059 U1.11
  Top Layer w1: R22.1 40.767,2.667 T10.3
  Bottom Layer w0.9: v1(52.451,17.145) v1(52.451,22.225) ; v1(79.121,41.783) v1(83.185,41.783)
SENSOR3: R20.1 T8.3 U1.8 | length 286.8
  Top Layer w1: U1.8 106.419,38.869 v1(106.426,38.862) ; v1(122.555,40.132) 142.748,40.132 144.018,41.402 v1(200.025,41.402) ; v1(216.535,41.402) 224.356,49.223 373.879,49.223 T8.3@376.112,46.99 ; R20.1 369.189,46.99 T8.3@376.112,46.99 ; T8.3@376.174,46.928 T8.3@376.112,46.99 ; T8.3 T8.3@376.112,46.99
  Bottom Layer w1: v1(106.426,38.862) 108.204,38.862 109.474,40.132 v1(122.555,40.132) ; v1(200.025,41.402) v1(216.535,41.402)
SENSOR4: R24.1 T12.3 U1.9 | length 299.8
  Top Layer w1: U1.9 106.419,37.599 v1(106.426,37.592) ; v1(122.555,31.369) 147.32,31.369 152.647,26.042 v1(152.647,24.765) ; v1(168.275,14.09) 184.665,14.09 197.978,0.777 v1(355.6,0.777) ; v1(364.49,0.777) 374.03,0.777 T12.3@375.666,2.413 ; R24.1 T12.3@375.666,2.413 ; T12.3 T12.3@375.666,2.413
  Bottom Layer w1: v1(106.426,37.592) 115.316,37.592 121.539,31.369 v1(122.555,31.369) ; v1(152.647,24.765) 152.647,21.216 159.773,14.09 v1(168.275,14.09) ; v1(355.6,0.777) v1(364.49,0.777)
SENSOR5: pad.12 pad.13@394.927,27.475 U1.6 | length 325.7
  Top Layer w1: U1.6 v1(106.419,41.409) ; v1(122.555,44.069) 140.589,44.069 141.732,45.212 v1(186.944,45.212) ; v1(207.645,20.955) 238.506,20.955 240.919,23.368 256.667,23.368 264.033,16.002 v1(309.245,16.002)
  Bottom Layer w1: v1(106.419,41.409) 109.079,44.069 v1(122.555,44.069) ; v1(186.944,45.212) 191.643,40.513 191.643,23.241 193.929,20.955 v1(207.645,20.955) ; v1(309.245,16.002) 333.502,16.002 344.975,27.475 394.927,27.475 pad.12
SENSOR6: pad.14 pad.15 U1.7 | length 325.2
  Top Layer w1: U1.7 106.419,40.139 v1(106.426,40.132) ; v1(122.555,42.799) 141.351,42.799 142.494,43.942 v1(186.055,43.942) ; v1(207.645,19.685) 239.141,19.685 241.674,22.218 255.912,22.218 263.525,14.605 v1(309.245,14.605)
  Bottom Layer w1: v1(106.426,40.132) 107.315,40.132 109.982,42.799 v1(122.555,42.799) ; v1(186.055,43.942) 190.366,39.631 190.366,22.613 193.294,19.685 v1(207.645,19.685) ; v1(309.245,14.605) 334.01,14.605 344.34,24.935 pad.14 pad.15
SENU: D10.2 U1.24 | length 116.7
  Top Layer w1: D10.2 25,33.509 33.909,42.418 v1(47.625,42.418) ; v1(54.61,42.418) 56.896,44.704 74.549,44.704 79.629,39.624 87.376,39.624 102.235,24.765 115.189,24.765 116.62,26.196 U1.24
  Bottom Layer w1: v1(47.625,42.418) v1(54.61,42.418)
SKC: R28.1 U1.30 | length 65.9
  Top Layer w0.5: 139.7,37.592 v1(155.575,37.592) ; v1(156.591,22.225) 156.591,15.875 158.342,14.124 R28.1
  Top Layer w1: U1.30 139.693,37.599
  Bottom Layer w0.5: v1(155.575,37.592) 156.591,36.576 v1(156.591,22.225)
STATUS: D8.2 U1.13 | length 84.4
  Top Layer w0.9: D8.2 49.514,42.91 54.508,47.904 76.556,47.904 80.511,43.949 91.433,43.949 96.52,38.862 v1(99.187,38.862) ; U1.13 104.147,32.519 105.41,33.782 v1(105.41,34.29)
  Bottom Layer w0.9: v1(99.187,38.862) 102.997,38.862 105.41,36.449 v1(105.41,34.29)
SUSPEND: R32.1 U4.11 | length 19.4
  Top Layer w0.3: U4.11 75.565,19.435 75.565,15.24
  Top Layer w0.8: R32.1 75.565,15.24
SñL: pad.16 pad.17 U1.23 | length 305.9
  Top Layer w1: U1.23 115.35,28.541 v1(115.443,28.448) ; v1(122.555,27.305) 125.469,30.219 146.692,30.219 151.497,25.414 v1(151.497,24.765) ; v1(168.275,12.94) v1(174.512,12.94) ; v1(184.15,16.51) 186.055,18.415 239.776,18.415 242.316,20.955 255.27,20.955 263.017,13.208 v2(310.515,13.208)
  Bottom Layer w1: v1(115.443,28.448) 116.586,27.305 v1(122.555,27.305) ; v1(151.497,24.765) 151.497,20.588 159.145,12.94 v1(168.275,12.94) ; v1(174.512,12.94) 180.58,12.94 v1(184.15,16.51) ; v2(310.515,13.208) 334.645,13.208 343.832,22.395 pad.17 pad.16
TXD: R31.2 U4.26 | length 13.8
  Top Layer w0.3: 62.357,35.306 62.357,31.936 U4.26
  Top Layer w0.8: 62.357,35.306 R31.2
TXUSB: R30.1 U1.35 | length 57.4
  Top Layer w1: R30.1 v1(72.39,43.434) ; v1(107.315,48.006) 113.792,48.006 117.849,43.949 U1.35
  Bottom Layer w1: v1(72.39,43.434) 76.962,48.006 v1(107.315,48.006)
V5V: C8.2 C11.1 D5.2 H17.2 IR3.3 IR4.3 IR5.3 IR6.3 J7.5 J8.2 pad.0@150,33.5 pad.0@397.467,42.715 pad.1@394.927,42.715 pad.2@394.927,40.175 pad.3@397.467,40.175 R18.2 R20.2 R22.2 R24.2 R34.1 SM1.2 T7.2 T9.2 T11.2 T13.2 U3.1 | length 669.1
  Top Layer w0.5: 2.794,19.05 2.794,25.419 3.567,26.192 J7.5 13.873,26.192 16.129,28.448 16.129,36.957 18.415,39.243 T7.2@25.146,39.243 ; T11.2 25.146,9.525 24.384,8.763 24.384,5.969 25.718,4.635 IR5.3 ; T7.2 T7.2@25.146,39.243 ; IR3.3 IR3.3@26.009,46.635 ; R18.2 29.823,49.276 25.781,49.276 25.146,48.641 25.146,47.498 IR3.3@26.009,46.635 ; T13.2 360.204,9.271 359.41,8.477 359.41,5.715 360.807,4.318 IR6.3 364.976,4.318 R24.2 ; IR4.3 363.5,46.635 364.363,47.498 R20.2 364.49,45.107 v1(364.49,41.91) ; T7.2@25.146,39.243 24.384,40.005 24.384,45.01 IR3.3@26.009,46.635
  Top Layer w0.9: v1(389.89,10.795) v1(389.89,31.242)
  Top Layer w1: 2.794,19.05 2.794,3.81 5.827,0.777 29.711,0.777 ; IR5.3 29.909,4.635 31.601,2.943 R22.2 29.711,0.777 ; v1(61.595,6.985) 57.643,6.985 51.435,0.777 ; v1(64.897,6.985) R34.1 ; SM1.2 156.825,28.575 v1(159.385,28.575) ; v1(155.194,22.225) 155.194,8.763 152.602,6.171 J8.2 139.882,3.94 H17.2 127.33,0.777 51.435,0.777 ; v1(175.26,26.035) v1(201.295,26.035) ; v1(206.248,26.035) 275.717,26.035 277.509,27.827 U3.1 288.992,27.827 C11.1 289.74,42.598 292.862,45.72 321.183,45.72 325.648,41.255 D5.2 ; C8.2 325.648,38.225 D5.2 ; T13.2 v1(364.49,9.271) ; pad.2@394.927,40.175 pad.1@394.927,42.715 ; pad.3@397.467,40.175 397.467,42.715 pad.1@394.927,42.715 ; 29.711,0.777 51.435,0.777 ; D5.2 358.394,40.64 359.791,39.243 T9.2 v1(363.22,39.243) 382.524,39.243 385.996,42.715 pad.1@394.927,42.715
  Top Layer w1.5: pad.0@150,33.5 151.9,33.5 SM1.2
  Bottom Layer w0.5: v1(363.22,39.243) 364.49,40.513 v1(364.49,41.91)
  Bottom Layer w0.9: v1(389.89,31.242) 389.89,37.592 392.473,40.175 394.927,40.175 pad.3@397.467,40.175
  Bottom Layer w1: v1(61.595,6.985) v1(64.897,6.985) ; pad.0@150,33.5 153.19,33.5 155.194,31.496 v1(155.194,22.225) ; v1(159.385,28.575) 172.72,28.575 v1(175.26,26.035) ; v1(201.295,26.035) v1(206.248,26.035) ; v1(364.49,9.271) 388.366,9.271 v1(389.89,10.795)
pads on no net: H16.1 H16.8 H16.9 H16.10 H16.11 IR3.2 IR4.2 IR5.2 IR6.2 J7.2 S1.3 S2.3 S3.3 S3.NC S4.1 S4.3 U1.17 U1.18 U1.19 U1.20 U1.21 U1.22 U1.32 U4.1 U4.2 U4.10 U4.12 U4.13 U4.14 U4.15 U4.16 U4.17 U4.18 U4.19 U4.20 U4.21 U4.22 U4.23 U4.27

## Polygon pours and split planes (outlines as drawn)
GND on Top Layer "Top Layer-No Net" (solid, pour order 4): 0,50 0,0 400,0 400,49.911
GND on Bottom Layer "Top Layer-No Net" (solid, pour order 6): 0,50 0,0 400,0 400,50

## Keep-outs
Keep-Out Layer:
  the board outline again, w0.254

## Silkscreen, mask and mechanical layers (free items; w line width, h text height)
Top Overlay:
  drawing of 80 lines, arcs and shapes, not listed
  text "OK" at 1.905,46.863 h2 r90
  text "5V" at 388.474,41.783 h2.5
  text "5V" at 388.474,39.243 h2.5
  text "GND" at 386.368,36.703 h2.5
  text "GND" at 386.368,34.163 h2.5
  text "-->" at 189.611,33.655 h5 r180
  text "12V" at 387.381,31.623 h2.5
  text "SME" at 386.461,29.21 h2.5
  text "SEN5" at 385.445,26.543 h2.5
  text "Status" at 51.054,26.289 h3.5
  text "-->" at 354.457,26.162 h5 r180
  text "-->" at 13.335,26.035 h5 r180
  text "SEN6" at 385.457,24.003 h2.5
  text "ON" at 334.518,23.114 h3 r90
  text "RST" at 101.473,22.098 h2.5 r90
  text "EN" at 111.76,21.717 h3 r90
  text "Link" at 51.054,21.59 h3.5
  text "SÑL" at 386.929,21.463 h2.5
  text "CONTA" at 103.632,21.336 h2 r90
  text "BOOT" at 120.65,21.082 h2.5 r90
  text "RLY" at 386.941,18.923 h2.5
  text "Sen Mag" at 157.226,18.669 h3.5 r90
  text "SEND" at 385.103,16.383 h2.5
  text "SCL" at 386.929,13.843 h2.5
  text "SDA" at 386.6,11.303 h2.5
  text "www.accesa.me" at 267.462,8.89 h5 r90
  text "3V3" at 387.223,8.763 h2.5
  text "Hecho en México" at 271.653,8.128 h5 r90
  text "OFF" at 284.861,8.128 h2.5 r90
  text "ON" at 291.973,8.128 h2.5 r90
  text "Receptor32UV1.0" at 263.779,8.001 h5 r90
  text "N/S:" at 80.645,6.858 h3.5 r90
  text "Receptor32UV1.0" at 19.05,6.604 h5 r90
  text "IN" at 389.255,6.223 h2.5
  text ":(" at 381,3.429 h2.5
  text "Sen Mag" at 146.558,0.762 h2.5 r90
Bottom Overlay:
  circle w0.254: c45,35 r3.6
  circle w0.254: c250,35 r3.6
  circle w0.254: c250,15 r3.6
  circle w0.254: c345,15 r3.6
  circle w0.254: c345,35 r3.6
  circle w0.254: c45,15 r3.6
  text "Receptor32UV1.0" at 263.906,42.672 h5 r90
  text "Hecho en México" at 271.653,42.164 h5 r90
  text "Receptor32UV1.0" at 84.709,41.783 h5 r90
  text "www.accesa.me" at 267.589,41.402 h5 r90
  text "Hecho en México" at 92.456,41.275 h5 r90
  text "www.accesa.me" at 88.392,40.513 h5 r90